# Altium PCB DashboardBoardREV2.PcbDoc (part 1 of 2)
Units mm, origin at the board's own origin, x right, y up, seen from the top; angles counter-clockwise.
Board outline 129.54 x 53.2 mm, 2 copper layers (Top Layer, Bottom Layer); 125 components, 110 nets, 472 pads, 144 vias.
Unrouted connection lines stored in the file: 8.
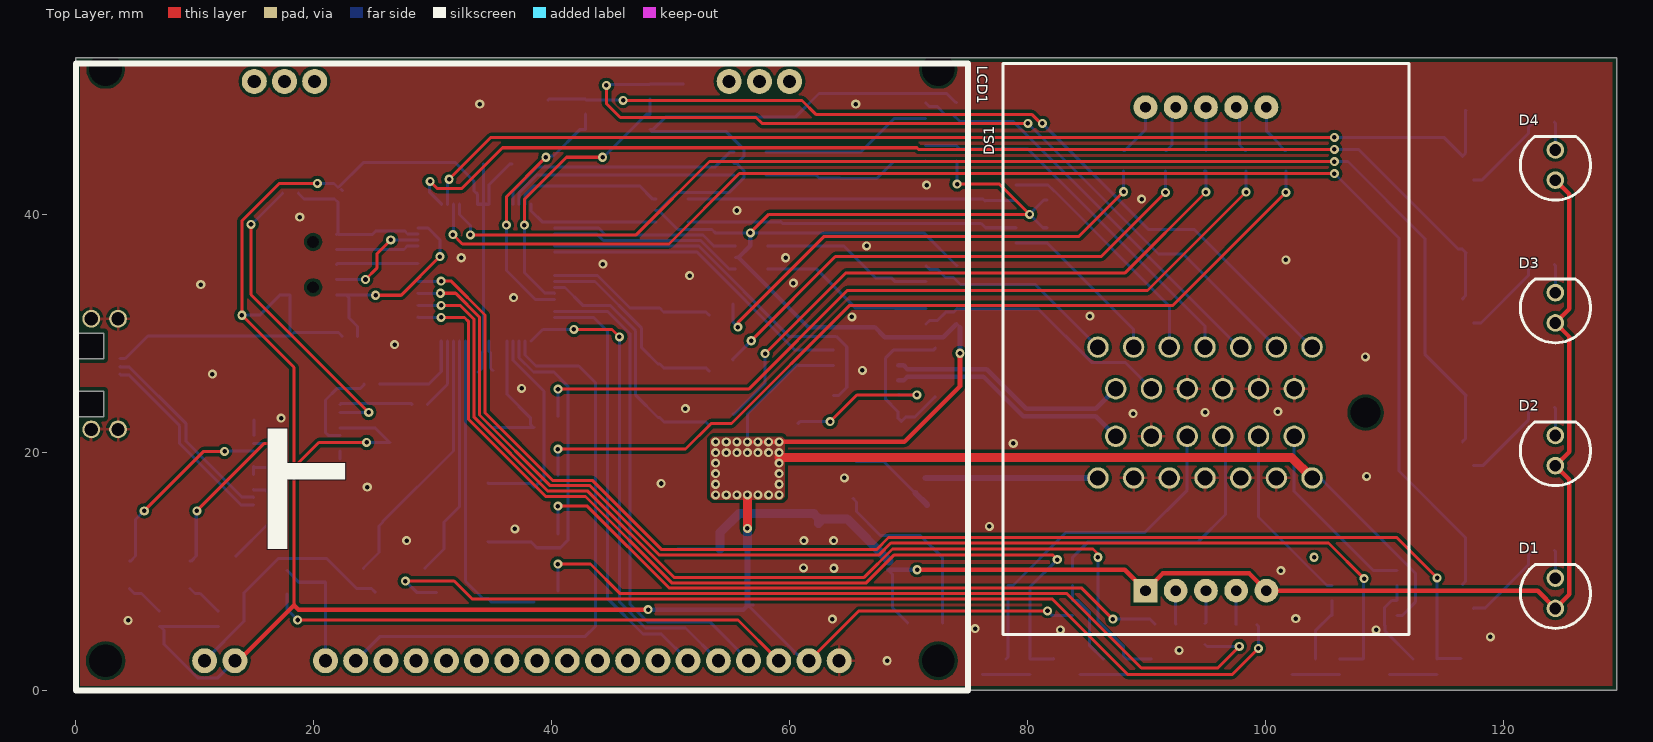
[diagram p0: Top Layer view]
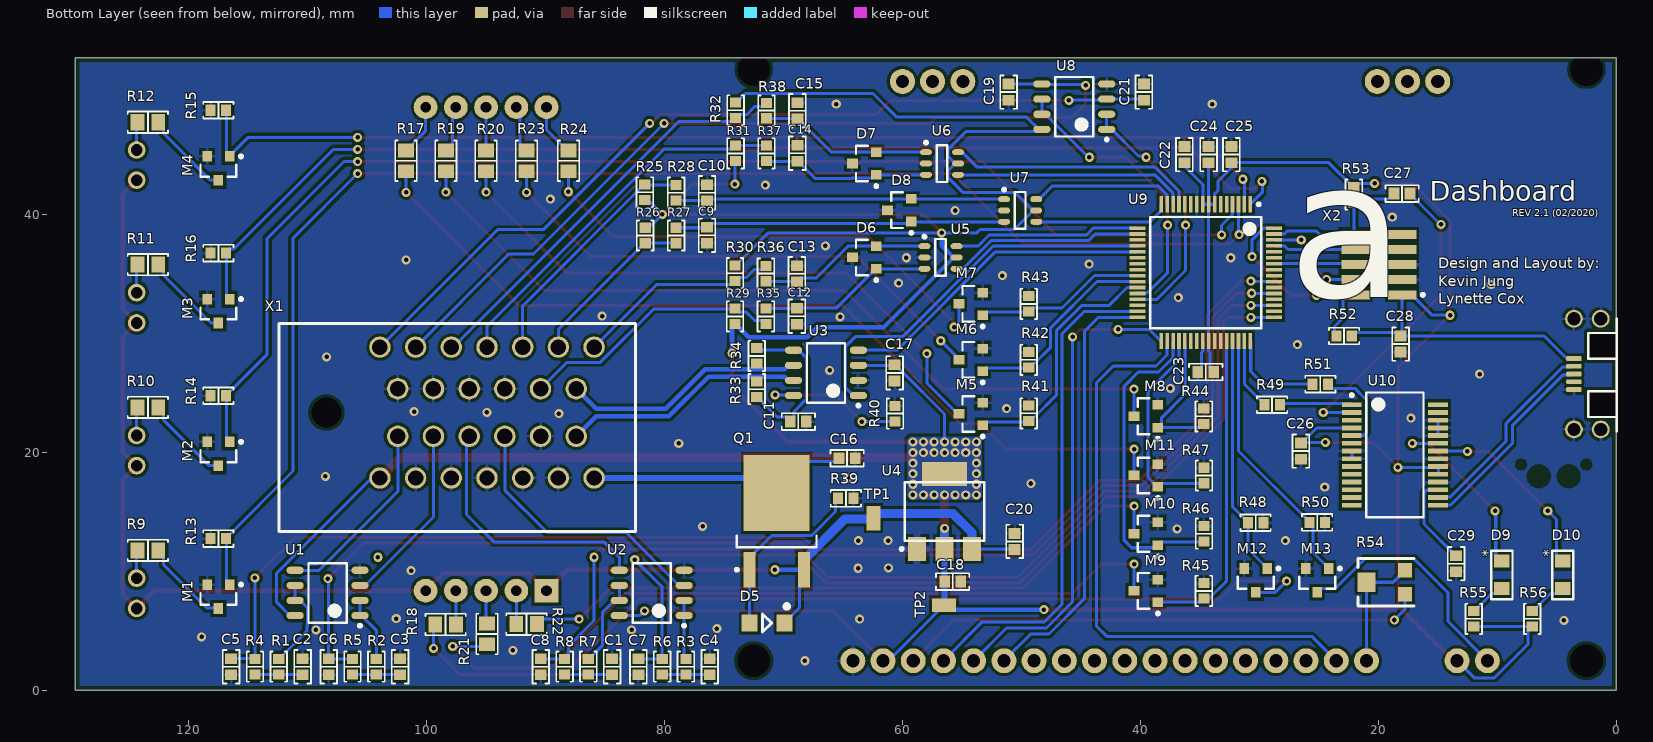
[diagram p1: Bottom Layer view, seen from below]
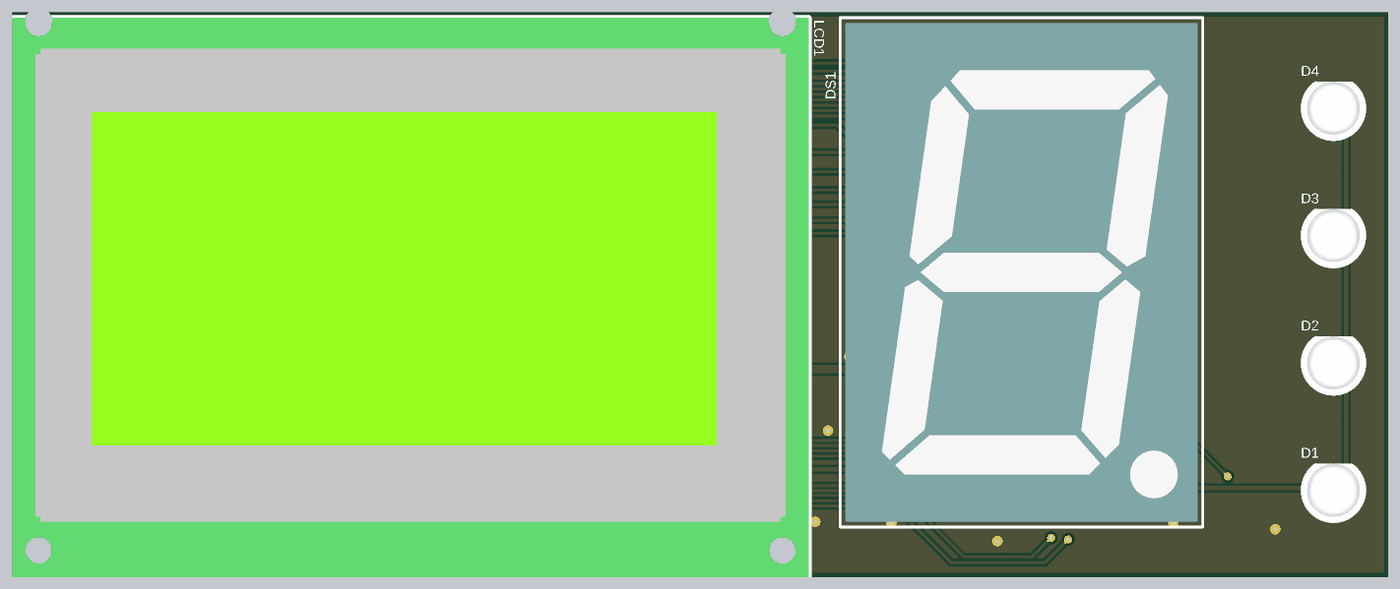
[diagram p3: 3D render of the assembled board from above, using the file's embedded part models]
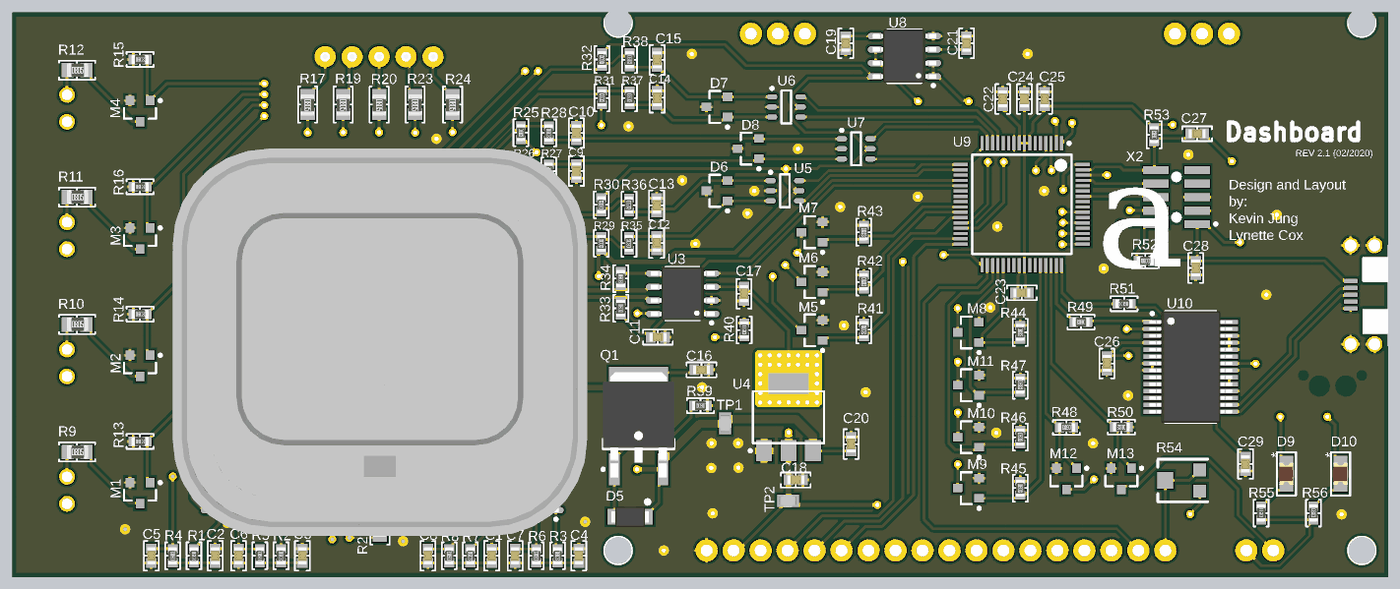
[diagram p4: 3D render of the assembled board from below, using the file's embedded part models]

## Layer stack, top to bottom
Top Solder: solder mask 0.0102, Solder Resist, Dk 3.5
Top Layer: signal copper 0.0356
Dielectric 1: dielectric 0.32, FR-4, Dk 4.8
Bottom Layer: signal copper 0.0356
Bottom Solder: solder mask 0.0102, Solder Resist, Dk 3.5

## Board outline
0,25.15 2.35,25.15 2.35,23 0,23 0,0 129.54,0 129.54,53.2 0,53.2 0,30.05 2.35,30.05 2.35,27.9 0,27.9

## Design rules (kind name [scope] priority, off if disabled: settings)
BoardOutlineClearance [All] p1: gap=0.254 ignorepadtopadclearanceinfootprint=FALSE except(0: Arc-SplitContinuation Track-SplitContinuation SMDPad-SplitContinuation THPad-SplitContinuation Via-SplitContinuation Fill-SplitContinuation Poly-SplitContinuation Region-SplitContinuation Text-OutlineEdge Text-SplitContinuation; 0.381: Arc-OutlineEdge Track-OutlineEdge SMDPad-OutlineEdge THPad-OutlineEdge Via-OutlineEdge Fill-OutlineEdge Poly-OutlineEdge Region-OutlineEdge)
Clearance [All] p1: gap=0.254 ignorepadtopadclearanceinfootprint=TRUE except(0: Arc-Hole Track-Hole SMDPad-Hole THPad-Hole Via-Hole Fill-Hole Poly-Hole Region-Hole Text-Hole; 0.203: Arc-Arc Arc-Track Arc-SMDPad Track-Track Track-SMDPad)
DiffPairsRouting [All] p1: maxlimit=0.254 minlimit=0.254 mostfreqgap=0.254 toplayer_minwidth=0.381 toplayer_maxwidth=0.381 toplayer_prefwidth=0.381 bottomlayer_minwidth=0.381 bottomlayer_maxwidth=0.381 bottomlayer_prefwidth=0.381 maxuncoupledlength=12.7
HoleSize [All] p1: absolutevalues=TRUE maxlimit=2.54 minlimit=0.381 maxpercent=80.000 minpercent=20.000
MinimumSolderMaskSliver [All] p1: minsoldermaskwidth=0.1
PolygonConnect [All] p1: thpad.connectstyle=Relief thpad.reliefconductorwidth=0.254 thpad.reliefentries=4 thpad.polygonreliefangle="90 Angle" thpad.airgapwidth=0.254 smdpad.connectstyle=Relief smdpad.reliefconductorwidth=0.254 smdpad.reliefentries=4 smdpad.polygonreliefangle="90 Angle" smdpad.airgapwidth=0.254 via.connectstyle=Direct via.reliefconductorwidth=0.254 via.reliefentries=4 via.polygonreliefangle="90 Angle" via.airgapwidth=0.254
RoutingVias [All] p1: holewidth=0.381 width=0.762 viastyle="Through Hole" minholewidth=0.254 minwidth=0.508 maxholewidth=0.711 maxwidth=1.27
SilkToSilkClearance [All] p1 off: silktosilkclearance=0.1
SilkToSolderMaskClearance [IsPad] p1 off: minsilkscreentomaskgap=0.1 clearancetoexposedcopper=TRUE
SolderMaskExpansion [All] p1: expansion=0.102
Width [All] p1: maxlimit=0.762 minlimit=0.203 preferedwidth=0.254 minimp=50.000000 maximp=50.000000 favimp=50.000000
25 further rules are at their usual default settings.

## Classes and differential pairs
channel class PassiveFilter: U_PassiveFilter1 U_PassiveFilter2 U_PassiveFilter3 U_PassiveFilter4
component class U_PassiveFilter4: C7 C11 R3 R6
component class U_PassiveFilter3: C20 C25 R7 R17
component class U_PassiveFilter2: C3 C27 R2 R20
component class U_PassiveFilter1: C2 C26 R1 R40
component class U_AnalogInputFiltering: U6 U10
channel class ButtonBuffering: U_ButtonBuffering1 U_ButtonBuffering2 U_ButtonBuffering3
component class U_ButtonBuffering3: C9 C28 D8 R25 R26 R27 R28 U3
component class U_ButtonBuffering2: C19 C21 D7 R31 R32 R37 R38 U6
component class U_ButtonBuffering1: C12 C16 D6 R29 R30 R35 R36 U8
component class U_12V_to_5V_LDO_1A: C9 C28 TP1 TP2 U3
component class U_CAN_5V: C11 C12 R14 R16 R56 U3
component class U_26PinSuperseal: X1
channel class LED_Driver: U_LED_Driver1 U_LED_Driver2 U_LED_Driver3 U_LED_Driver4 U_LED_Driver5 U_LED_Driver6 U_LED_Driver7 U_LED_Driver8 U_LED_Driver9 U_LED_Driver10 U_LED_Driver11 U_LED_Driver12 U_LED_Driver13
component class U_WARNING_LEDS: D4 D6 D7 R29 R30 R31 R32
component class U_RVPOVP: C21 D4 Q1 R28
component class U_MKE1xFxxxVLH: C18 C19 C20 C24 C25 R26 R27 U6 X1
component class U_LED_Driver13: M3 R16
component class U_LED_Driver12: M4 R56
component class U_LED_Driver11: M1 R49
component class U_LED_Driver10: M2 R14
component class U_LED_Driver9: M13 R50
component class U_LED_Driver8: M7 R43
component class U_LED_Driver7: M6 R42
component class U_LED_Driver6: M5 R41
component class U_LED_Driver5: M8 R44
component class U_LED_Driver4: M11 R47
component class U_LED_Driver3: M10 R46
component class U_LED_Driver2: M9 R45
component class U_LED_Driver1: M12 R48
component class U_LCD: LCD1 R54
component class U_FTDI_USB_UART: C19 C26 C27 D6 D10 R10 R20 R40 R56 U8
component class U_WheelInputConditioning: C19 C20 U3
component class U_7_SEGMENT: DS1 R10 R14 R16 R29 R40 R49 R56
differential pair CAN: +CAN_P -CAN_N

## Components (designator, comment, footprint, x,y, rotation, side; value= is the part's Value field where it differs from the comment)
C1 "capacitor" 0603 84.4,2 r270 bottom (schematic designator C18)
C2 "capacitor" 0603 110.425,2 r270 bottom (schematic designator C18)
C3 "capacitor" 0603 102.225,2 r270 bottom (schematic designator C18)
C4 "capacitor" 0603 76.2,2 r270 bottom (schematic designator C18)
C5 "capacitor" 0603 116.425,2 r90 bottom (schematic designator C19)
C6 "capacitor" 0603 108.225,2 r90 bottom (schematic designator C19)
C7 "capacitor" 0603 82.2,2 r90 bottom (schematic designator C19)
C8 "capacitor" 0603 90.4,2 r90 bottom (schematic designator C19)
C9 "capacitor" 0603 76.425,38.263 r90 bottom (schematic designator C17)
C10 "capacitor" 0603 76.425,41.838 r270 bottom (schematic designator C16)
C11 "capacitor" 0603 68.75,22.6 r180 bottom (schematic designator C4)
C12 "capacitor" 0603 68.875,31.463 r90 bottom (schematic designator C17)
C13 "capacitor" 0603 68.875,35.038 r270 bottom (schematic designator C16)
C14 "capacitor" 0603 68.825,45.163 r270 bottom (schematic designator C17)
C15 "capacitor" 0603 68.825,48.738 r270 bottom (schematic designator C16)
C16 "capacitor" 0603 64.65,19.525 r0 bottom (schematic designator C13)
C17 "capacitor" 0603 60.65,26.7 r90 bottom (schematic designator C3)
C18 "capacitor" 0603 55.775,9.15 r0 bottom (schematic designator C2)
C19 "capacitor" 0603 51.075,50.3 r270 bottom (schematic designator C15)
C20 "capacitor" 0603 50.575,12.527 r270 bottom (schematic designator C1)
C21 "capacitor" 0603 39.7,50.3 r90 bottom (schematic designator C14)
C22 "capacitor" 0603 36.3,45.05 r270 bottom (schematic designator C11)
C23 "capacitor" 0603 34.5,26.775 r180 bottom (schematic designator C12)
C24 "capacitor" 0603 34.263,45.05 r270 bottom (schematic designator C9)
C25 "capacitor" 0603 32.35,45.05 r270 bottom (schematic designator C8)
C26 "capacitor" 0603 26.5,20.125 r90 bottom (schematic designator C5)
C27 "capacitor" 0603 18,41.775 r180 bottom (schematic designator C6)
C28 "capacitor" 0603 18.125,29.125 r90 bottom (schematic designator C10)
C29 "capacitor" 0603 13.45,10.661 r90 bottom (schematic designator C7)
D1 "LED" "LED TH" 124.374,8.169 r90 top locked (schematic designator D6)
D2 "LED" "LED TH" 124.374,20.169 r90 top locked (schematic designator D7)
D3 "LED" "LED TH" 124.374,32.169 r90 top locked (schematic designator D4)
D4 "LED" "LED TH" 124.374,44.169 r90 top locked (schematic designator D5)
D5 "" SOD123F 71.375,5.675 r180 bottom (schematic designator D3)
D6 "AZ23C4V7-7-F Dual Zenner Diodes" SOT23-3 63.2,36.4 r0 bottom (schematic designator D8)
D7 "AZ23C4V7-7-F Dual Zenner Diodes" SOT23-3 63.2,44.3 r0 bottom (schematic designator D8)
D8 "AZ23C4V7-7-F Dual Zenner Diodes" SOT23-3 60.25,40.375 r0 bottom
D9 "LED" 0805_LED 9.6,9.725 r90 bottom (schematic designator D1)
D10 "LED" 0805_LED 4.5,9.725 r90 bottom (schematic designator D2)
DS1 "" SA15-11EWA 89.92,8.393 r0 top locked
LCD1 "" CFAG12864S 0,0 r0 top locked
M1 "" SOT23-3 117.5,7.899 r270 bottom
M2 "" SOT23-3 117.5,19.899 r270 bottom (schematic designator M1)
M3 "" SOT23-3 117.5,31.899 r270 bottom (schematic designator M1)
M4 "" SOT23-3 117.5,43.899 r270 bottom (schematic designator M1)
M5 "" SOT23-3 54.25,23.248 r0 bottom (schematic designator M1)
M6 "" SOT23-3 54.25,27.798 r0 bottom (schematic designator M1)
M7 "" SOT23-3 54.25,32.498 r0 bottom (schematic designator M1)
M8 "" SOT23-3 39.532,23.053 r0 bottom (schematic designator M1)
M9 "" SOT23-3 39.526,8.375 r0 bottom (schematic designator M1)
M10 "" SOT23-3 39.525,13.177 r0 bottom (schematic designator M1)
M11 "" SOT23-3 39.525,18.075 r0 bottom (schematic designator M1)
M12 "" SOT23-3 30.3,9.252 r270 bottom (schematic designator M1)
M13 "" SOT23-3 25.131,9.252 r270 bottom (schematic designator M1)
Q1 "DMP3010LK3-13" DMP3010LK3-13 70.575,14.25 r90 bottom
R1 "1k" "RES 0603/1608" 112.425,2 r270 bottom (schematic designator R29)
R2 "1k" "RES 0603/1608" 104.225,2 r270 bottom (schematic designator R29)
R3 "1k" "RES 0603/1608" 78.2,2 r270 bottom (schematic designator R29)
R4 "1k" "RES 0603/1608" 114.425,2 r90 bottom (schematic designator R30)
R5 "1k" "RES 0603/1608" 106.225,2 r90 bottom (schematic designator R30)
R6 "1k" "RES 0603/1608" 80.2,2 r90 bottom (schematic designator R30)
R7 "1k" "RES 0603/1608" 86.4,2 r270 bottom (schematic designator R29)
R8 "1k" "RES 0603/1608" 88.4,2 r90 bottom (schematic designator R30)
R9 "820" "RES 0805/2012" 123.425,11.775 r180 bottom (schematic designator R23)
R10 "820" "RES 0805/2012" 123.425,23.8 r180 bottom (schematic designator R24)
R11 "820" "RES 0805/2012" 123.425,35.8 r180 bottom (schematic designator R21)
R12 "820" "RES 0805/2012" 123.425,47.768 r180 bottom (schematic designator R22)
R13 "10k" "RES 0603/1608" 117.5,12.774 r180 bottom (schematic designator R17)
R14 "10k" "RES 0603/1608" 117.5,24.774 r180 bottom (schematic designator R17)
R15 "10k" "RES 0603/1608" 117.5,48.774 r180 bottom (schematic designator R17)
R16 "10k" "RES 0603/1608" 117.5,36.774 r180 bottom (schematic designator R17)
R17 "470" "RES 0805/2012" 101.725,44.525 r270 bottom (schematic designator R8)
R18 "470" "RES 0805/2012" 98.4,5.55 r180 bottom (schematic designator R7)
R19 "470" "RES 0805/2012" 98.375,44.525 r270 bottom (schematic designator R6)
R20 "680" "RES 0805/2012" 95,44.525 r270 bottom (schematic designator R5)
R21 "470" "RES 0805/2012" 94.92,4.75 r90 bottom (schematic designator R4)
R22 "470" "RES 0805/2012" 91.6,5.575 r0 bottom (schematic designator R2)
R23 "470" "RES 0805/2012" 91.6,44.525 r270 bottom (schematic designator R3)
R24 "470" "RES 0805/2012" 88.075,44.525 r270 bottom (schematic designator R1)
R25 "10k" "RES 0603/1608" 81.65,41.875 r270 bottom
R26 "10k" "RES 0603/1608" 81.625,38.25 r90 bottom
R27 "1k" "RES 0603/1608" 79.025,38.25 r90 bottom (schematic designator R28)
R28 "1k" "RES 0603/1608" 79.025,41.85 r270 bottom (schematic designator R27)
R29 "10k" "RES 0603/1608" 74.075,31.45 r270 bottom (schematic designator R26)
R30 "10k" "RES 0603/1608" 74.075,35.075 r90 bottom (schematic designator R25)
R31 "10k" "RES 0603/1608" 74.025,45.15 r270 bottom (schematic designator R26)
R32 "10k" "RES 0603/1608" 74.025,48.775 r90 bottom (schematic designator R25)
R33 "62" "RES 0603/1608" 72.25,25.325 r270 bottom (schematic designator R10)
R34 "62" "RES 0603/1608" 72.25,28.125 r270 bottom (schematic designator R9)
R35 "1k" "RES 0603/1608" 71.475,31.45 r90 bottom (schematic designator R28)
R36 "1k" "RES 0603/1608" 71.475,35.05 r270 bottom (schematic designator R27)
R37 "1k" "RES 0603/1608" 71.425,45.15 r270 bottom (schematic designator R28)
R38 "1k" "RES 0603/1608" 71.425,48.75 r270 bottom (schematic designator R27)
R39 "10k" "RES 0603/1608" 64.75,16.15 r0 bottom (schematic designator R20)
R40 "100" "RES 0603/1608" 60.625,23.275 r270 bottom (schematic designator R11)
R41 "10k" "RES 0603/1608" 49.375,23.298 r270 bottom (schematic designator R17)
R42 "10k" "RES 0603/1608" 49.375,27.798 r270 bottom (schematic designator R17)
R43 "10k" "RES 0603/1608" 49.375,32.498 r270 bottom (schematic designator R17)
R44 "10k" "RES 0603/1608" 34.657,23.053 r270 bottom (schematic designator R17)
R45 "10k" "RES 0603/1608" 34.651,8.375 r270 bottom (schematic designator R17)
R46 "10k" "RES 0603/1608" 34.65,13.177 r270 bottom (schematic designator R17)
R47 "10k" "RES 0603/1608" 34.65,18.075 r270 bottom (schematic designator R17)
R48 "10k" "RES 0603/1608" 30.3,14.1 r0 bottom (schematic designator R17)
R49 "1k" "RES 0603/1608" 28.925,24.025 r0 bottom (schematic designator R13)
R50 "10k" "RES 0603/1608" 25.131,14.127 r0 bottom (schematic designator R17)
R51 "1k" "RES 0603/1608" 24.875,25.75 r0 bottom (schematic designator R12)
R52 "10k" "RES 0603/1608" 22.875,29.8 r180 bottom (schematic designator R18)
R53 "10k" "RES 0603/1608" 22.05,41.675 r90 bottom (schematic designator R19)
R54 "TC33X-2-103E" 35WR 19.35,9.1 r90 bottom (schematic designator R16)
R55 "1k" "RES 0603/1608" 11.975,6.025 r270 bottom (schematic designator R14)
R56 "1k" "RES 0603/1608" 7.05,6.025 r270 bottom (schematic designator R15)
TP1 "RCU-0C" RCU-0C 62.427,14.487 r0 bottom
TP2 "RCU-0C" RCU-0C 56.5,7.175 r90 bottom
U1 "MCP6002T-I" SOIC-8 108.325,8.2 r0 bottom (schematic designator U8)
U2 "MCP6002T-I" SOIC-8 81.075,8.2 r0 bottom (schematic designator U7)
U3 "MCP2561 CAN Transceiver" SOIC-8 66.425,26.7 r0 bottom (schematic designator U2)
U4 "NCP1117ST50T3G" SOT-223-3 56.46,15.05 r90 bottom (schematic designator U1)
U5 "74LVC2G17GW" TSOP95P280X110-6N 56.8,36.4 r180 bottom (schematic designator U6)
U6 "74LVC2G17GW" TSOP95P280X110-6N 56.67,44.3 r180 bottom
U7 "74LVC2G17GW" TSOP95P280X110-6N 50.1,40.35 r180 bottom (schematic designator U6)
U8 "MCP6002T-I" SOIC-8 45.55,49.075 r0 bottom (schematic designator U5)
U9 "MKE18F512VLH16" TQFP64 34.5,35.125 r270 bottom (schematic designator U4)
U10 "FT232RL" SSOP-28 18.6,19.8 r180 bottom (schematic designator U3)
X1 "" TE_Amp_6437288-6 94.92,23.364 r270 bottom locked (schematic designator X2)
X2 "CN-2P-M-R10" HDR2X5_SMT 19.95,35.8 r90 bottom (schematic designator X1)

## Footprints (in the part's own frame and the unit in brackets; to place one, negate y for a bottom-side part, rotate by r counter-clockwise, add the part's x,y. Pads: shape width x height; smd on the part's side, far side on the other; paste and mask are expansions set on the pad)
35WR [mm]
  rect 1.2x1.2 smd: 1(-1,-1.6) 3(1,-1.6)
  rect 1.6x1.5 smd: 2(0,1.65)
  silkscreen extent -2,-2.35 2,2.35
0603 [mm]
  rect 0.9x1 smd: 1(-0.675,0) 2(0.675,0)
  silkscreen extent -1.4,-0.7 1.4,0.7, body extent -0.8,-0.41 0.8,0.41, height 0.82
0805_LED [mm]
  rect 1.1x1.3 smd: 1(-1.15,0) 2(1.15,0)
  silkscreen extent -2.06,-0.89 2.03,0.89, body extent -1.05,-0.67 1.05,0.67, height 0.9
CFAG12864S [mm]
  round 2.1 hole 1.1: 1(64.17,2.5) 2(61.63,2.5) 3(59.09,2.5) 4(56.55,2.5) 5(54.01,2.5) 6(51.47,2.5) 7(48.93,2.5) 8(46.39,2.5) 9(43.85,2.5) 10(41.31,2.5) 11(38.77,2.5) 12(36.23,2.5) 13(33.69,2.5) 14(31.15,2.5) 15(28.61,2.5) 16(26.07,2.5) 17(23.53,2.5) 18(20.99,2.5) 19(13.37,2.5) 20(10.83,2.5) ""(15,51.2) ""(17.54,51.2) ""(20.08,51.2) ""(54.92,51.2) ""(57.46,51.2) ""(60,51.2)
  round 0 hole 2.75: 21(2.5,52.2) 22(72.5,52.2) 23(72.5,2.5) 24(2.5,2.5)
  silkscreen extent 0,0 75,52.7, body extent 0,0 75,52.7, height 8.9
DMP3010LK3-13 [mm] "D-PAK, 3-Pads, Body 6.20x6.71mm (max), IPC Medium Density"
  rect 3x1 smd: 1(-4.1,2.29) 2(-4.1,-2.29)
  rect 6.4x5.55 smd: 3(2.35,0)
  silkscreen extent -4.22,-3.35 -1.25,3.47, body extent -4.86,-3.35 5.04,3.35, height 2.39
HDR2X5_SMT [mm] "Header, 10-Leads, Body 3.43x6.35mm, Pitch 1.27mm"
  rect 0.76x2.4 smd: 1(-2.54,-1.95) 2(-2.54,1.95) 3(-1.27,-1.95) 4(-1.27,1.95) 5(0,-1.95) 6(0,1.95) 7(1.27,-1.95) 8(1.27,1.95) 9(2.54,-1.95) 10(2.54,1.95)
  round 0 hole 1 unplated: MH1(-1.905,0) MH2(1.905,0)
  silkscreen extent -2.66,-3.82 -2.42,-3.57, body extent -3.17,-1.72 3.17,1.72, height 4.55
"LED TH" [mm]
  round 1.48 hole 0.98: 1(-1.27,0) 2(1.27,0)
  silkscreen extent -2.95,-2.95 2.42,2.95, body extent -3,-3 2.5,3, height 8.8
RCU-0C [mm]
  rect 1.15x2.05 smd: 1(0,0)
  body extent -0.6,-0.78 0.6,0.82, height 1.16
"RES 0603/1608" [mm] "Chip Resistor, 2-Leads, Body 1.60x0.80mm, IPC Medium Density"
  rect 0.85x0.95 smd: 1(-0.65,0) 2(0.65,0)
  silkscreen extent -1.27,-0.7 1.27,0.7, body extent -0.8,-0.4 0.8,0.4, height 0.45
"RES 0805/2012" [mm] "Chip Resistor, 2-Leads, Body 2.00x1.25mm, IPC Medium Density"
  rect 1.15x1.35 smd: 1(-0.875,0) 2(0.875,0)
  silkscreen extent -1.7,-0.9 1.7,0.9, body extent -0.95,-0.62 1.05,0.63, height 0.6
SA15-11EWA [mm]
  rect 2x2 hole 0.9: 1(0,0)
  round 2 hole 0.9: 2(2.54,0) 3(5.08,0) 4(7.62,0) 5(10.16,0) 6(10.16,40.64) 7(7.62,40.64) 8(5.08,40.64) 9(2.54,40.64) 10(0,40.64)
  silkscreen extent -12,-3.68 22.16,44.32, body extent -11.5,-3.18 21.65,43.82, height 12.5
SOD123F [mm] "SODFL, 2-Leads, Body 1.80x3.50mm, IPC Low Density"
  rect 1.35x1.45 smd: 1(-1.475,0) 2(1.475,0)
  silkscreen extent -0.38,-0.76 1.75,1.5, body extent -1.75,-0.95 1.75,0.95, height 1.15
SOIC-8 [mm] "SOIC, 8-Leads, Body 4.90x3.90mm, Pitch 1.27mm, IPC Medium Density"
  oval 1.45x0.6 smd: 1(-2.725,1.905) 2(-2.725,0.635) 3(-2.725,-0.635) 4(-2.725,-1.905) 5(2.725,-1.905) 6(2.725,-0.635) 7(2.725,0.635) 8(2.725,1.905)
  silkscreen extent -2.85,-2.5 1.6,2.88, body extent -3,-2.5 3,2.5, height 1.75
SOT23-3 [mm] "SOT23, 3-Leads, Body 2.92x2.37mm, Pitch 0.95mm, IPC Medium Density, NUP2105L"
  rect 0.9x0.8 smd: 1(-1,0.95) 2(-1,-0.95) 3(1,0)
  silkscreen extent -1.12,-1.5 0.7,2.02, body extent -0.7,-1.52 0.7,1.52, height 1.11
SOT-223-3 [mm] "SOT223127P600-8N, NCP1117STAT3G, MMBT4403-7-F"
  rect 2x1.5 smd: 1(-3.15,2.3) 2(-3.15,0) 3(-3.15,-2.3)
  rect 2x3.8 smd: THM(3.15,0)
  silkscreen extent -3.27,-3.35 2.45,3.73, body extent -1.85,-3.35 1.85,3.35, height 1.8
SSOP-28 [mm] "hi"
  rect 1.65x0.4 smd: 1(-3.625,4.225) 2(-3.625,3.575) 3(-3.625,2.925) 4(-3.625,2.275) 5(-3.625,1.625) 6(-3.625,0.975) 7(-3.625,0.325) 8(-3.625,-0.325) 9(-3.625,-0.975) 10(-3.625,-1.625) 11(-3.625,-2.275) 12(-3.625,-2.925) 13(-3.625,-3.575) 14(-3.625,-4.225) 15(3.625,-4.225) 16(3.625,-3.575) 17(3.625,-2.925) 18(3.625,-2.275) 19(3.625,-1.625) 20(3.625,-0.975) 21(3.625,-0.325) 22(3.625,0.325) 23(3.625,0.975) 24(3.625,1.625) 25(3.625,2.275) 26(3.625,2.925) 27(3.625,3.575) 28(3.625,4.225)
  silkscreen extent -3.75,-5.25 2.4,5.25, body extent -3.9,-5.25 3.9,5.25, height 2
TE_Amp_6437288-6 [mm] "TE_Amp_6437288-6"
  round 1.8 hole 1.3: 1(5.5,9) 2(5.5,6) 3(5.5,3) 4(5.5,0) 5(5.5,-3) 6(5.5,-6) 7(5.5,-9) 8(2,7.5) 9(2,4.5) 10(2,1.5) 11(2,-1.5) 12(2,-4.5) 13(2,-7.5) 14(-2,7.5) 15(-2,4.5) 16(-2,1.5) 17(-2,-1.5) 18(-2,-4.5) 19(-2,-7.5) 20(-5.5,9) 21(-5.5,6) 22(-5.5,3) 23(-5.5,0) 24(-5.5,-3) 25(-5.5,-6) 26(-5.5,-9)
  round 0 hole 2.5: 27(0,-13.5)
  silkscreen extent -7.5,-17.5 10,12.5, body extent -17,-19.5 19.5,19.5, height 24.71
TQFP64 [mm] "TSQFP, 64-Leads, Body 10.00x10.00mm, Pitch 0.50mm, IPC Medium Density, MKE18F512VLH16"
  rect 1.35x0.3 smd: 1(-5.75,3.75) 2(-5.75,3.25) 3(-5.75,2.75) 4(-5.75,2.25) 5(-5.75,1.75) 6(-5.75,1.25) 7(-5.75,0.75) 8(-5.75,0.25) 9(-5.75,-0.25) 10(-5.75,-0.75) 11(-5.75,-1.25) 12(-5.75,-1.75) 13(-5.75,-2.25) 14(-5.75,-2.75) 15(-5.75,-3.25) 16(-5.75,-3.75) 33(5.75,-3.75) 34(5.75,-3.25) 35(5.75,-2.75) 36(5.75,-2.25) 37(5.75,-1.75) 38(5.75,-1.25) 39(5.75,-0.75) 40(5.75,-0.25) 41(5.75,0.25) 42(5.75,0.75) 43(5.75,1.25) 44(5.75,1.75) 45(5.75,2.25) 46(5.75,2.75) 47(5.75,3.25) 48(5.75,3.75)
  rect 0.3x1.35 smd: 17(-3.75,-5.75) 18(-3.25,-5.75) 19(-2.75,-5.75) 20(-2.25,-5.75) 21(-1.75,-5.75) 22(-1.25,-5.75) 23(-0.75,-5.75) 24(-0.25,-5.75) 25(0.25,-5.75) 26(0.75,-5.75) 27(1.25,-5.75) 28(1.75,-5.75) 29(2.25,-5.75) 30(2.75,-5.75) 31(3.25,-5.75) 32(3.75,-5.75) 49(3.75,5.75) 50(3.25,5.75) 51(2.75,5.75) 52(2.25,5.75) 53(1.75,5.75) 54(1.25,5.75) 55(0.75,5.75) 56(0.25,5.75) 57(-0.25,5.75) 58(-0.75,5.75) 59(-1.25,5.75) 60(-1.75,5.75) 61(-2.25,5.75) 62(-2.75,5.75) 63(-3.25,5.75) 64(-3.75,5.75)
  silkscreen extent -5.87,-4.67 4.67,4.68, body extent -5,-5 5,5, height 1.6
TSOP95P280X110-6N [mm] "TSOP, 6-Leads, Body 2.90x1.50mm, Pitch 0.95mm, IPC Medium Density"
  oval 1x0.5 smd: 1(-1.35,0.95) 2(-1.35,0) 3(-1.35,-0.95) 4(1.35,-0.95) 5(1.35,0) 6(1.35,0.95)
  silkscreen extent -1.48,-1.55 0.45,1.87, body extent -0.85,-1.55 0.85,1.55, height 1.1

## Part data
C1 C2 C3 C4 C5 C6 C7 C8: library part 1, "Generic 0603 capacitor", capacitance=.1uF, Dielectric=Ceramic, package=0603, percent tolerance=10, voltage=50, ESR=1, id=1, name="0603 Capacitor", quantity=0
C9 C10 C12 C13 C14 C15 C19 C21: library part 1, "Generic 0603 capacitor", capacitance=1uF, Dielectric=Ceramic, package=0603, percent tolerance=10, voltage=50, ESR=1, id=1, name="0603 Capacitor", quantity=0
C11: library part 1, "Generic 0603 capacitor", capacitance=4700pF, Dielectric=Ceramic, package=0603, percent tolerance=10, voltage=50, ESR=1, id=1, name="0603 Capacitor", quantity=0
C16: library part 1, "Generic 0603 capacitor", capacitance=0.01uF, Dielectric=Ceramic, package=0603, percent tolerance=10, voltage=50, ESR=1, id=1, name="0603 Capacitor", quantity=0
C17 C22 C23 C24 C25 C28: library part 1, "Generic 0603 capacitor", capacitance=0.1uF, Dielectric=Ceramic, package=0603, percent tolerance=10, voltage=50, ESR=1, id=1, name="0603 Capacitor", quantity=0
C18 C20: library part 1, "Generic 0603 capacitor", capacitance=10uF, Dielectric=Ceramic, package=0603, percent tolerance=10, voltage=50, ESR=1, id=1, name="0603 Capacitor", quantity=0
C26 C27 C29: library part 1, "Generic 0603 capacitor", capacitance=0.1uF, id=1
D1 D2 D3 D4: library part 23, "Thru Hole LED", createdby=Andrew, createddate="10/16/2019 10:17:38 PM", id=23, name=LED, numcircuits=1, quantity=1, updatedby=Andrew, updateddate="10/16/2019 10:17:38 PM", vr=2.59999990463257
D5: library part 10, "Zener Diode 14V 500mW ±5% Surface Mount SOD-1", package=SOD-123, id=10, link=https://www.digikey.com/product-detail/en/diodes-incorporated/DDZ9701-7/DDZ9701-7DICT-ND/3877402, name=DDZ9701, quantity=0
D6 D7 D8: library part 14, "DIODE ZENER ARRAY 4.7V SOT23-3", package=SOT23-3, id=14, link=https://www.digikey.com/product-detail/en/diodes-incorporated/AZ23C4V7-7-F/AZ23C4V7-FDICT-ND/815309, name=AZ23C4V7-7-F, quantity=0
D9 D10: library part 19, "Generic 0805 LED", id=19
DS1: library part 40, "7SEG DISPLAY 1DIGIT RED 1.5\" CA", voltageinmax=5, createdby=Kevin, id=40, link=https://www.digikey.com/short/pdvmpz, name=SA15-11EWA, quantity=0, vcc=4
LCD1: library part 41, "Sunlight Readable 128x64 SPI or Parallel Graphic LCD", voltageinmax=5.5, createdby=Kevin, id=41, link=https://www.crystalfontz.com/product/cfag12864syyhvt-lcd-graphical-128x64, name=CFAG12864S, quantity=0, vcc=5
M1 M2 M3 M4 M5 M6 M7 M8 M9 M10 M11 M12 M13: library part 6, "MOSFET N-CHANNEL 30V 5A SOT23", current=2.8A, package=SOT-23, id=6, link=https://www.digikey.com/product-detail/en/diodes-incorporated/DMG2302UK-7/DMG2302UK-7DICT-ND/6010163, name=DMG2302UK-7, numcircuits=1, quantity=0, rdson=90mOhm, Type=N_Channel, vdsmax=0, vgsmax=1, vt=800
Q1: library part 26, "P-Channel MOSFET 30V 17A TO252", current=17A, Manufacturer_id=1, package=TO-252-3, createdby=Kevin, Drawer_id=1, id=26, idFuse=3, link=https://www.digikey.com/product-detail/en/diodes-incorporated/DMP3010LK3-13/DMP3010LK3-13DICT-ND/3076574, name=DMP3010LK3-13, numcircuits=1, quantity=0, rdson=8mOhm, Type=P_Channel, vdsmax=30, vgsmax=20
R1 R2 R3 R4 R5 R6 R7 R8 R13 R14 R15 R16 R25 R26 R29 R30 R31 R32 R33 R34 R39 R40 R41 R42 R43 R44 R45 R46 R47 R48 R49 R50 R51 R52 R53 R55 R56: library part 1, package=0603, percent tolerance=5, id=1, name="0603 Resistor", quantity=0
  R1 R2 R3 R4 R5 R6 R7 R8 R49 R51 R55 R56: resistance=1k
  R13 R14 R15 R16 R25 R26 R29 R30 R31 R32 R39 R41 R42 R43 R44 R45 R46 R47 R48 R50 R52 R53: resistance=10k
  R33 R34: resistance=62
  R40: resistance=100
R9 R10 R11 R12 R17 R18 R19 R20 R21 R22 R23 R24: library part 2, package=0805, percent tolerance=5, Power=1/4, createdby=Kevin, id=2, name="0805 Resistor", quantity=0
  R9 R10 R11 R12: resistance=820
  R17 R18 R19 R21 R22 R23 R24: resistance=470
  R20: resistance=680
R27 R28 R35 R36 R37 R38: library part 1, id=1, resistance=1k
R54: library part 1, "TRIMMER 10K OHM 0.1W J LEAD TOP", package="SOD-23 Bourns", resistance=10, voltage=50, createdby=Kevin, createddate=10/15/2019, Digi-Key_Part_Number=TC33X-103ECT-ND, Digi-Key_Purchase_URL=https://www.digikey.com/product-detail/en/bourns-inc/TC33X-2-103E/TC33X-103ECT-ND/612911?utm_source=snapeda&utm_medium=aggregator&utm_campaign=symbol, id=1, link=https://www.digikey.com/product-detail/en/bourns-inc/TC33X-2-103E/TC33X-103ECT-ND/612911, MF=Bourns, MP=TC33X-2-103E, name=TC33X-2-103E, numcontacts=3, numrows=0, Pitch=0, quantity=0, SnapEDA_Link=https://www.snapeda.com/parts/TC33X-2-103E/Bourns/view-part/?ref=snap
TP1 TP2: library part 14, id=14, link=https://www.digikey.com/product-detail/en/te-connectivity-amp-connectors/RCU-0C/A106145CT-ND/3477802, name=RCU-0C, numcontacts=1, numrows=1, quantity=0
U1 U2 U8: library part 2, "Rail-to-Rail 2 Circuit OPAMP 8SOIC", currentoutput=23, voltage=6, voltagelow=1.79999995231628, createdby=Kevin, gbw=0, id=2, link=https://www.digikey.com/product-detail/en/microchip-technology/MCP6002T-I-SN/MCP6002T-I-SNCT-ND/4307905, name=MCP6002T-I, Num_Circuits=2, quantity=0, slewrate=0.600000023841858, voltagehigh=6
U3: library part 5, package=SOIC-8, id=5, link=https://www.digikey.com/product-detail/en/microchip-technology/MCP2561T-E-SN/MCP2561T-E-SNCT-ND/5148846, name=null, quantity=0, Type=CAN, vcc=0
U4: library part 16, "5V linear regulator", package=SOT-223-3, id=16, imax=1, link=https://www.digikey.com/product-detail/en/on-semiconductor/NCP1117ST50T3G/NCP1117ST50T3GOSCT-ND/1967217, name=NCP1117ST50T3G, quantity=0
U5 U6 U7: library part 17, "Buffer, Non-Inverting 2 Element 1 Bit per Element Push-Pull Output 6-TSSOP", package=SOT457, createdby=Nolan, createddate="10/16/2019 10:08:58 PM", id=17, name=74LVC2G17, quantity=0, Type=buffer, updatedby=Nolan, updateddate="10/16/2019 10:08:58 PM", vcc=5
U9: library part 1, "32b NXP Microcontroller", package=TQFP64, voltagemax=5.5, voltagemin=2.70000004768372, id=1, name=MKE18F512VLH16, quantity=0
U10: library part 3, id=3, link=https://www.digikey.com/product-detail/en/ftdi-future-technology-devices-international-ltd/FT232RL-REEL/768-1007-1-ND/1836402, name=null, quantity=0, Type=UART, vcc=0
X1: library part 7, "AMP SuperSeal Straight", id=7, link=https://www.digikey.com/product-detail/en/te-connectivity-amp-connectors/6437288-6/A123256-ND/2329274, name=6437288-6, numcontacts=26, numrows=4, Pitch=3mm, quantity=0
X2: library part 4, "CONN_TE_2X5POS", id=4, link=https://www.digikey.com/product-detail/en/5103309-1/A33160-ND/1114898?utm_campaign=buynow&WT.z_cid=ref_octopart_dkc_buynow&utm_medium=aggregator&curr=usd&site=us&utm_source=octopart, name=5103309-1, numcontacts=10, numrows=2, Pitch=2.54mm, quantity=0

## Free pads (board coordinates)
  round 1.5 hole 1.1: 0(1.3,21.95) 0(1.3,31.25) 0(3.55,21.95) 0(3.55,31.25)
  rrect50% 1.3x0.4 smd far side: 1(3.55,27.9) 2(3.55,27.25) 3(3.55,26.6) 4(3.55,25.95) 5(3.55,25.3)

## Via types
v1: diameter 0.762, hole 0.381, Top Layer to Bottom Layer, 144 vias

## Nets (pads, with @x,y where several pads share a name; then routed paths per layer and width w, separated by ;. In a path a pad name is that pad's centre, name@x,y a point inside that pad or via, vN(x,y) a via of type N, cw(c..) or ccw(c..) an arc to the next point about the centre after c; other vN are vias at no path point)
3V3_OUT: C29.2 U10.17 | length 7.8
  Bottom Layer w0.254: C29.2@13.45,11.275 13.45,11.286 16.156,13.992 16.156,16.628 15.933,16.851 14.974,16.851 U10.17@14.95,16.875
5V: C17.2 C18.2 C22.2 C23.2 C24.2 C25.2 C26.2 C28.2 LCD1.2 LCD1.19 pad.1 R25.2 R26.2 R29.2 R30.2 R31.2 R32.2 R52.2 R53.2 R55.2 R56.2 TP2.1 U1.8 U2.8 U3.3 U4.2 U4.THM U5.5 U6.5 U7.5 U8.8 U9.7 U9.8 U9.9 U9.41 U10.4 U10.19 U10.20 X1.7 X2.1 | length 462.4
  Top Layer w0.254: LCD1.19@13.37,2.5 LCD1.19@13.67,2.5 ; 18.345,7.175 v1(18.345,18.763) ; v1(20.3,42.625) 17.097,42.625 13.963,39.491 v1(13.963,31.545) 18.345,27.163 v1(18.345,18.763) ; v1(24.45,20.85) 20.433,20.85 v1(18.345,18.763) ; v1(56.45,13.625) v1@56.452,13.627 ; v1@56.452,16.447 v1(56.454,16.449) ; v1(56.454,20.894) v1@58.236,20.894 ; v1(56.7,38.475) 58.25,40.025 v1(80.175,40.025) 77.625,42.575 v1(74.075,42.575) ; LCD1.2@61.63,2.5 65.83,6.7 v1(81.682,6.7)
  Top Layer w0.381: LCD1.19@13.67,2.5 18.345,7.175 18.72,6.8 v1(48.1,6.8) ; v1@58.236,20.894 69.644,20.894 74.325,25.575 v1(74.325,28.35)
  Top Layer w0.762: v1@56.452,13.627 v1@56.452,16.447 ; 59.121,19.6 102.184,19.6 X1.7@103.92,17.864
  Bottom Layer w0.254: pad.1@3.7,27.9 4.15,27.9 6.05,29.8 C28.2@18.05,29.8 ; R56.2@7.05,5.375 R56.2@7.1,5.375 ; R55.2@11.975,5.375 R56.2@7.1,5.375 ; LCD1.19@13.37,2.5 11.939,1.069 10.237,1.069 7.398,3.908 7.398,5.077 R56.2@7.1,5.375 ; v1(13.963,31.545) 15.465,31.545 17.18,33.26 X2.1@18,33.26 18,29.85 C28.2@18.05,29.8 ; U10.19@14.95,18.175 14.95,18.825 15.012,18.763 v1(18.345,18.763) ; C28.2@18.125,29.8 C28.2@18.05,29.8 ; v1(20.3,42.625) 21.7,42.625 22,42.325 R53.2@22.05,42.325 22.1,42.325 24.15,44.375 31.925,44.375 33.462,42.838 33.462,42.027 33.781,41.708 U9.7@33.781,40.875 ; U10.4@22.2,22.075 U10.4@22.225,22.075 25.175,22.075 26.4,20.85 v1(24.45,20.85) ; R53.2@22.3,42.125 R53.2@22.398,42.027 ; R52.2@22.375,29.75 22.375,29.8 22.077,30.098 18.348,30.098 C28.2@18.05,29.8 ; U9.7@33.75,40.875 U9.7@33.781,40.875 ; C23.2@33.825,26.775 34.148,27.098 34.148,28.409 34.25,28.511 U9.41@34.25,29.375 U9.8@34.25,40.875 ; C24.2@34.262,44.25 34.25,44.237 U9.8@34.25,40.875 ; C22.2@36.65,44.25 36.475,44.25 34.719,42.494 34.719,40.875 U9.8@34.25,40.875 ; U8.8@48.275,47.17 U8.8@48.545,47.17 ; U7.5@48.75,40.35 U7.5@49,40.35 ; U6.5@55.32,44.3 U6.5@55.57,44.3 ; U5.5@55.45,36.4 U5.5@55.7,36.4 ; v1(56.45,13.625) v1@56.46,13.615 ; v1(56.454,20.894) 56.454,23.246 60.013,26.805 60.03,26.805 60.6,27.375 C17.2@60.65,27.375 60.69,27.335 U3.3@63.7,27.335 ; TP2.1@56.46,7.215 TP2.1@56.5,7.175 ; U4.2@56.46,11.9 U4.2@56.46,11.998 ; TP2.1@56.95,7.175 TP2.1@56.5,7.175 ; LCD1.2@61.63,2.5 61.175,2.5 TP2.1@56.5,7.175 ; R29.2@74.025,30.8 R29.2@74.075,30.8 R29.2@74.325,30.55 ; R31.2@74.025,44.5 74.075,44.45 v1(74.075,42.575) ; R32.2@74.025,49.425 73.975,49.425 73.207,50.193 62.465,50.193 60.472,48.2 49.575,48.2 U8.8@48.545,47.17 ; R30.2@74.075,35.725 74.025,35.725 71.275,38.475 v1(56.7,38.475) 53.744,38.475 53.472,38.747 50.603,38.747 U7.5@49,40.35 ; R26.2@81.625,38.9 81.3,38.9 v1(80.175,40.025) 81.375,41.225 R25.2@81.65,41.225 ; v1(81.682,6.7) 82.087,6.295 U2.8@83.8,6.295 ; X1.7@103.92,17.864 104.607,17.864 112.6,9.871 112.6,7.42 111.475,6.295 U1.8@111.05,6.295 ; U9.7@33.781,40.875 U9.8@34.25,40.875 ; U8.8@48.545,47.17 48.375,47 54.641,47 56.15,45.49 56.15,44.88 U6.5@55.57,44.3 ; U7.5@49,40.35 50.53,41.88 54.921,41.88 56.15,43.11 56.15,43.72 U6.5@55.57,44.3
  Bottom Layer w0.381: v1(48.1,6.8) 56.125,6.8 TP2.1@56.5,7.175 ; v1(56.7,38.475) 56.7,37.4 55.7,36.4 61.55,30.55 67.145,30.55 67.995,29.7 72.925,29.7 R29.2@74.025,30.8 ; v1(74.325,28.35) R29.2@74.325,30.55
  Bottom Layer w0.508: C18.2@56.42,9.165 56.46,9.205 U4.2@56.46,11.9 ; TP2.1@56.46,7.215 C18.2@56.46,9.045
  Bottom Layer w0.762: U4.2@56.46,11.998 v1@56.46,13.615
  other v1: 53.787,16.449 54.676,16.449 55.565,16.449 57.343,16.449 58.232,16.449 59.121,16.449 53.787,17.338 59.121,17.338 53.787,18.227 59.121,18.227 53.787,19.116 59.121,19.116 53.787,20.005 54.676,20.005 55.565,20.005 56.454,20.005 57.343,20.005 58.232,20.005 59.121,20.005 53.787,20.894 54.676,20.894 55.565,20.894 57.343,20.894 58.232,20.894 59.121,20.894
7SEG_a: DS1.7 R19.1 | length 4
  Bottom Layer w0.254: DS1.7@97.54,49.033 97.827,48.746 97.827,45.848 98.275,45.4 R19.1@98.375,45.4
7SEG_a_SIG: M8.1 R44.2 U9.37 | length 12.2
  Bottom Layer w0.254: R44.2@34.657,22.403 34.955,22.105 38.53,22.105 M8.1@38.532,22.103 ; U9.37@36.25,29.375 36.25,24.896 38.209,22.937 38.209,22.376 M8.1@38.48,22.105
7SEG_b: DS1.6 R17.1 | length 4.4
  Bottom Layer w0.254: DS1.6@100.08,49.033 100.08,47.045 101.177,45.948 101.177,45.848 101.625,45.4 R17.1@101.725,45.4
7SEG_b_SIG: M11.1 R47.2 U9.36 | length 17.7
  Bottom Layer w0.254: R47.2@34.65,17.425 34.677,17.398 38.252,17.398 M11.1@38.525,17.125 38.575,17.125 39.363,17.913 39.363,25.15 36.758,27.755 36.758,27.935 36.75,27.943 U9.36@36.75,29.375
7SEG_c: DS1.4 R18.2 | length 2.8
  Bottom Layer w0.254: R18.2@97.525,5.55 97.54,5.565 DS1.4@97.54,8.393